# Altium PCB dsPIC_reciver_pcb2.PcbDoc
Units mm, origin at the board's own origin, x right, y up, seen from the top; angles counter-clockwise.
Board outline 54.36 x 85.34 mm, 2 copper layers (Top Layer, Bottom Layer); 37 components, 31 nets, 145 pads, 18 vias.
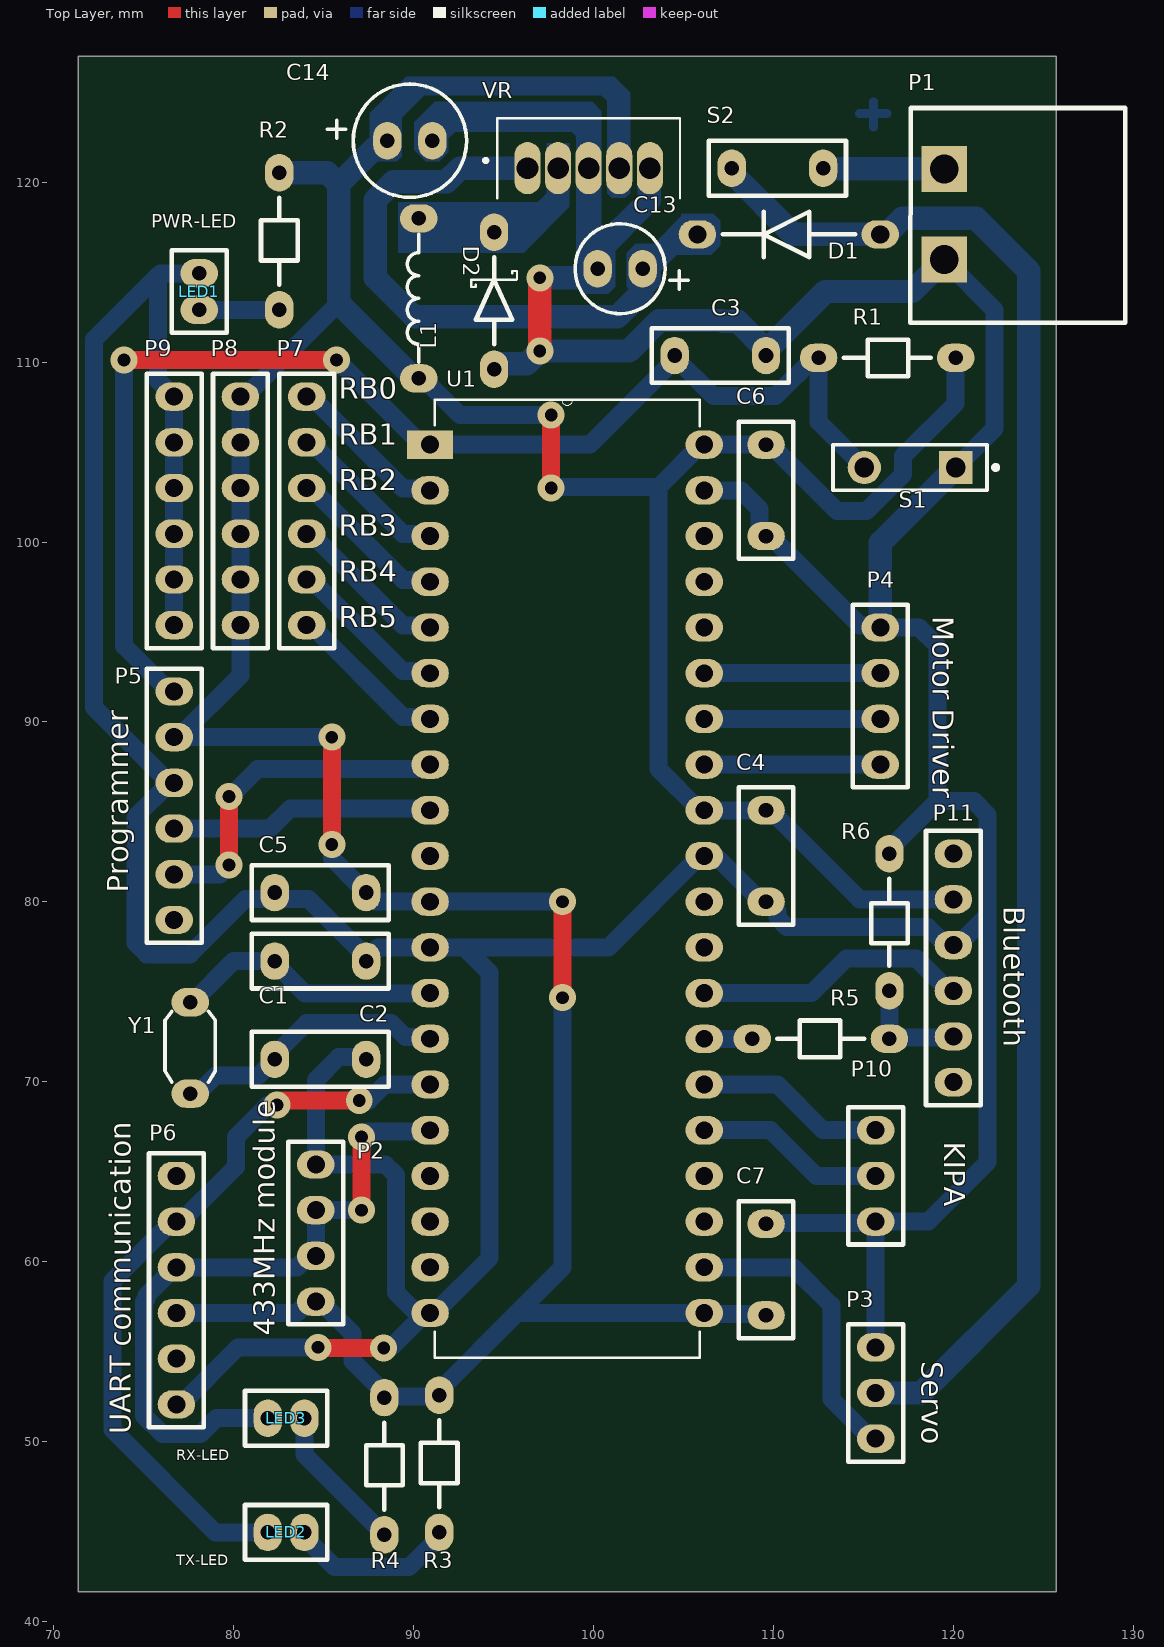
[diagram p0: Top Layer view]
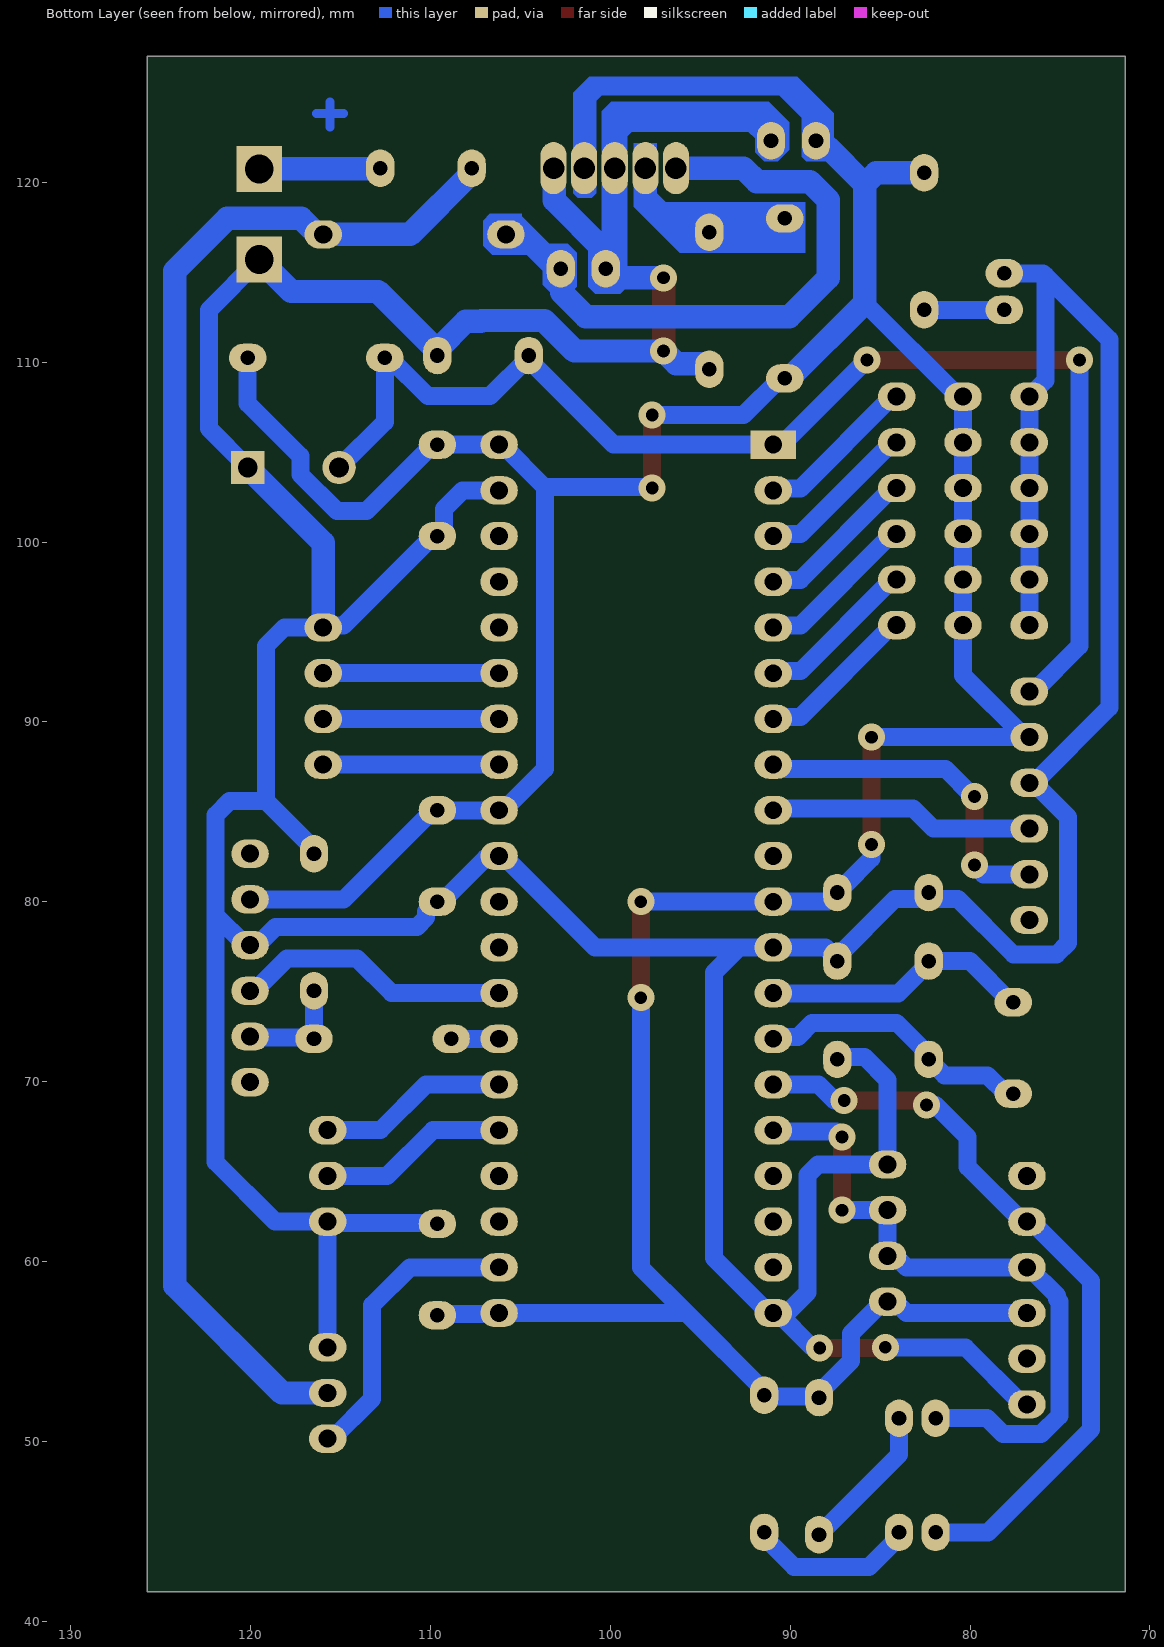
[diagram p1: Bottom Layer view, seen from below]

## Layer stack, top to bottom
Top Solder: solder mask 0.0102, Solder Resist, Dk 3.5
Top Layer: signal copper 0.0356
Dielectric 1: dielectric 0.32, FR-4, Dk 4.8
Bottom Layer: signal copper 0.0356
Bottom Solder: solder mask 0.0102, Solder Resist, Dk 3.5

## Board outline
71.374,41.656 125.73,41.656 125.73,127 71.374,127

## Design rules (kind name [scope] priority, off if disabled: settings)
Clearance [All] p1: gap=0.254 ignorepadtopadclearanceinfootprint=FALSE except(0: Arc-Hole Track-Hole SMDPad-Hole THPad-Hole Via-Hole Fill-Hole Poly-Hole Region-Hole Text-Hole; 0.127: THPad-THPad)
PolygonConnect [All] p1: connectstyle=Relief reliefconductorwidth=0.254 reliefentries=4 polygonreliefangle="90 Angle" airgapwidth=0.254
RoutingVias [All] p1: holewidth=0.711 width=1.27 viastyle="Through Hole" minholewidth=0.711 minwidth=1.27 maxholewidth=0.711 maxwidth=1.27
SolderMaskExpansion [All] p1: expansion=0.102
Width [All] p1: maxlimit=1.3 minlimit=0.5 preferedwidth=1
30 further rules are at their usual default settings.

## Components (designator, comment, footprint, x,y, rotation, side; value= is the part's Value field where it differs from the comment)
C1 "Cap" CAP200 87.376,76.708 r180 top value=22pF
C2 "Cap" CAP200 87.376,71.247 r180 top value=22pF
C3 "Cap" CAP200 109.601,110.363 r180 top value=100nF
C4 "Cap" CAP200 109.601,80.01 r90 top value=100nF
C5 "Cap" CAP200 82.296,80.518 r0 top value=100nF
C6 "Cap" CAP200 109.601,100.33 r90 top value=100nF
C7 "Cap" CAP200 109.601,62.103 r270 top value=100nF
C13 "Cap Pol1" RAD4 102.743,115.189 r180 top value=100uF
C14 "Cap Pol1" RAD6_3 88.559,122.301 r0 top value=1000uF
D1 "1N4004" DIODE400 115.951,117.094 r180 top
D2 "1N5819" SDIODE300 94.488,109.601 r90 top
L1 "Inductor" INDUCTOR_9 90.297,117.983 r270 top value=100uH
LED1 "GREEN" LED_2 78.105,112.903 r90 top
LED2 "GREEN" LED_2 83.947,44.958 r180 top
LED3 "GREEN" LED_2 83.947,51.308 r180 top
P1 "2EDGRC-5.08-02P-14-00A(H)" PWR_Con 119.507,115.697 r0 top
P2 "Reciver" HEADER_4 84.582,57.785 r180 top
P3 "Servo" HEADER_3 115.697,55.245 r0 top
P4 "Motor control" HEADER_4 115.951,87.63 r180 top
P5 "Programator" HEADER_6 76.708,91.694 r0 top
P6 "FT232" HEADER_6 76.835,64.77 r0 top
P7 "I/O" HEADER_6 84.074,108.077 r0 top
P8 "Header 6" HEADER_6 80.391,108.077 r0 top
P9 "Header 6" HEADER_6 76.708,108.077 r0 top
P10 "KIPA" HEADER_3 115.697,67.31 r0 top
P11 "Bluetooth" HEADER_6 120.015,82.677 r0 top
R1 "Res1" RES400 112.522,110.236 r0 top value=10K
R2 "Res1" RES400 82.55,112.903 r90 top value=1K
R3 "Res1" RES400 91.44,44.958 r90 top value=1K
R4 "Res1" RES400 88.392,44.831 r90 top value=1K
R5 "Res1" RES400 116.459,72.39 r180 top value=4.7K
R6 "Res1" RES400 116.459,82.677 r270 top value=10K
S1 "SW-PB" SPST-2 117.602,104.14 r180 top
S2 "SW-SPST" CAP200 112.776,120.777 r180 top
U1 "DSPIC30F4013-20E/P" DIP_40 106.172,57.15 r0 top
VR "LM2576T-5.0" TO170P1067X483X1651-5 99.744,120.777 r0 top
Y1 "XTAL" OSC_5 77.597,69.342 r90 top

## Footprints (in the part's own frame and the unit in brackets; to place one, negate y for a bottom-side part, rotate by r counter-clockwise, add the part's x,y. Pads: shape width x height; smd on the part's side, far side on the other; paste and mask are expansions set on the pad)
CAP200 [mil]
  oval 62x82 hole 32: 1(0,0) 2(200,0)
  silkscreen extent -50,-60 250,60
DIODE400 [mil]
  oval 82x62 hole 40: 1(0,0) 2(400,0)
  silkscreen extent 55,-50 345,50
DIP_40 [mil]
  rect 100x62 hole 39: 1(-600,1900)
  oval 82x62 hole 39: 2(-600,1800) 3(-600,1700) 4(-600,1600) 5(-600,1500) 6(-600,1400) 7(-600,1300) 8(-600,1200) 9(-600,1100) 10(-600,1000) 11(-600,900) 12(-600,800) 13(-600,700) 14(-600,600) 15(-600,500) 16(-600,400) 17(-600,300) 18(-600,200) 19(-600,100) 20(-600,0) 21(0,0) 22(0,100) 23(0,200) 24(0,300) 25(0,400) 26(0,500) 27(0,600) 28(0,700) 29(0,800) 30(0,900) 31(0,1000) 32(0,1100) 33(0,1200) 34(0,1300) 35(0,1400) 36(0,1500) 37(0,1600) 38(0,1700) 39(0,1800) 40(0,1900)
  silkscreen extent -590,-98 -10,1998
HEADER_3 [mil]
  oval 82x62 hole 39.37: 1(0,0) 2(0,-100) 3(0,-200)
  silkscreen extent -60,-250 60,50
HEADER_4 [mil]
  oval 82x62 hole 39.37: 1(0,0) 2(0,-100) 3(0,-200) 4(0,-300)
  silkscreen extent -60,-350 60,50
HEADER_6 [mil]
  oval 82x62 hole 39.37: 1(0,0) 2(0,-100) 3(0,-200) 4(0,-300) 5(0,-400) 6(0,-500)
  silkscreen extent -60,-550 60,50
INDUCTOR_9 [mil]
  oval 62x82 hole 32: 1(0,0) 2(350,0)
  silkscreen extent 35,-25 315,0
LED_2 [mil]
  oval 62x82 hole 32: 1(0,0) 2(80,0)
  silkscreen extent -50,-60 130,60
OSC_5 [mil]
  oval 62x82 hole 32: 1(0,0) 2(200,0)
  silkscreen extent 25,-55 180,55
PWR_Con [mm]
  rect 2.54x2.54 hole 1.6: 1(0,0) 2(0,5.029)
  silkscreen extent -1.88,-3.51 10.06,8.42, body extent -2.01,-3.59 10,8.57, height 8.73
RAD4 [mil]
  oval 62x82 hole 32: 1(0,0) 2(98.43,0)
  silkscreen extent -100,-98 147,98
RAD6_3 [mil]
  oval 62x82 hole 32: 1(0,0) 2(98.43,0)
  silkscreen extent -131,-124 173,124
RES400 [mil]
  oval 82x62 hole 32: 1(0,0) 2(300,0)
  silkscreen extent 55,-40 245,40
SDIODE300 [mil]
  oval 82x62 hole 32: 1(0,0) 2(300,0)
  silkscreen extent 55,-50 245,50
SPST-2 [mm] "Switch; 2 Leads"
  rect 1.85x1.85 hole 1.1: 1(-2.54,0)
  round 1.85 hole 1.1: 2(2.54,0)
  silkscreen extent -4.89,-1.27 4.28,1.27
TO170P1067X483X1651-5 [mm]
  oval 1.45x2.9 hole 1.2: 1(-3.4,0) 2(-1.7,0) 3(0,0) 4(1.7,0) 5(3.4,0)
  silkscreen extent -5.82,-1.68 5.08,2.77

## Part data
C1 C2 C3 C4 C5 C6 C7: "Capacitor", LatestRevisionDate=17-Jul-2002, LatestRevisionNote="Re-released for DXP Platform.", PackageDescription="Radial Cap, Thru-Hole; 2 Leads; 0.3 in Pin Spacing", PackageReference=RAD-0.3, Published=8-Jun-2000, Publisher="Altium Limited"
C13 C14: "Polarized Capacitor (Radial)", LatestRevisionDate=17-Jul-2002, LatestRevisionNote="Re-released for DXP Platform.", PackageDescription="Polarized Capacitor (Radial); 2 Leads", PackageReference=RB7.6-15, Published=8-Jun-2000, Publisher="Altium Limited"
D1: library part "Diode 1N4004", "1 Amp General Purpose Rectifier", Code_JEDEC=DO-204-AL, ComponentLink1Description="Manufacturer Link", ComponentLink1URL=http://www.fairchildsemi.com/, ComponentLink2Description=Datasheet, ComponentLink2URL=http://www.fairchildsemi.com/ds/1N%2F1N4001.pdf, DatasheetVersion=1998, LatestRevisionDate=17-Jul-2002, LatestRevisionNote="Re-released for DXP Platform.", PackageDescription="Diode, Axial; Body 5.2 x 2.7 mm (LxDia. max), Lead Dia. 0.86 mm (max)", PackageReference=DO-41, PackageVersion=Aug-1999, Published=8-Jun-2000, Publisher="Altium Limited"
D2: library part "D Schottky", "Schottky Diode", Code_JEDEC=DO-214-AA, LatestRevisionDate=17-Jul-2002, LatestRevisionNote="Re-released for DXP Platform.", PackageDescription="DO-214-AA/SMB; 2 C-Bend Leads; Body 5.3 x 3.6 mm, inc. leads (LxW)", PackageReference=SMB, Published=8-Jun-2000, Publisher="Altium Limited"
LED1 LED2 LED3: library part LED1, "Typical RED GaAs LED", LatestRevisionDate=08-Jul-2005, LatestRevisionNote="Mech Layer 1 removed.", PackageDescription="LED; 2 Leads", PackageReference=LED-1, Published=8-Jun-2000, Publisher="Altium Limited"
P1: library part 00000002, "TERM BLOCK HDR 2POS 90DEG 5.08MM", Manufacturer Part Number=2EDGRC-5.08-02P-14-00A(H), Price=0.1304, Suplier=TME, Suplier Product Link=https://www.tme.eu/en/details/2edgrc5.08-2p14/pluggable-terminal-blocks/degson-electronics/2edgrc-508-02p-14-00ah/
P2 P4: library part "Header 4", "Header, 4-Pin", LatestRevisionDate=17-Jul-2002, LatestRevisionNote="Re-released for DXP Platform.", Publisher="Altium Limited"
P3 P10: library part "Header 3", "Header, 3-Pin", LatestRevisionDate=17-Jul-2002, LatestRevisionNote="Re-released for DXP Platform.", Publisher="Altium Limited"
P5 P6 P7 P11: library part "Header 6", "Header, 6-Pin", LatestRevisionDate=17-Jul-2002, LatestRevisionNote="Re-released for DXP Platform.", Publisher="Altium Limited"
P8 P9: "Header, 6-Pin", LatestRevisionDate=17-Jul-2002, LatestRevisionNote="Re-released for DXP Platform.", Publisher="Altium Limited"
R1 R2 R3 R4 R5 R6: "Resistor", LatestRevisionDate=17-Jul-2002, LatestRevisionNote="Re-released for DXP Platform.", PackageDescription="Axial Device, Thru-Hole; 2 Leads; 0.3 in Pin Spacing", PackageReference=AXIAL-0.3, Published=8-Jun-2000, Publisher="Altium Limited"
S1: "Switch", LatestRevisionDate=17-Jul-2002, LatestRevisionNote="Re-released for DXP Platform.", PackageDescription="Switch; 2 Leads", PackageReference=SPST-2, Published=24-Mar-1999, Publisher="Altium Limited"
S2: "Single-Pole, Single-Throw Switch", LatestRevisionDate=17-Jul-2002, LatestRevisionNote="Re-released for DXP Platform.", PackageDescription="Switch; 2 Leads", PackageReference=SPST-2, Published=24-Mar-1999, Publisher="Altium Limited"
U1: "dsPIC dsPIC™ 30F Microcontroller IC 16-Bit 20 MIPS 48KB _16K x 24_ FLASH 40-PDIP", Package="DIP-40 Microchip", Digi-Key_Part_Number=DSPIC30F4013-20EP-ND, Digi-Key_Purchase_URL=https://www.digikey.rs/product-detail/en/microchip-technology/DSPIC30F4013-20E-P/DSPIC30F4013-20EP-ND/739428?utm_source=snapeda&utm_medium=aggregator&utm_campaign=symbol, MF=Microchip, MP=DSPIC30F4013-20E/P, SnapEDA_Link=https://www.snapeda.com/parts/DSPIC30F4013-20E/P/Microchip/view-part/143007/?ref=snap
VR: "Conv DC-DC 4V to 40V Inv/Step Down Single-Out 5V 3A 5-Pin(5+Tab) TO-220 Tube", Package=None, Availability=Warning, BuyPart=https://www.snapeda.com/parts/LM2576T-5.0/HTC%20Korea/view-part/4830195/?ref=eda, DigiKey-Purchase-URL=https://snapeda.com/shop?store=DigiKey&id=4830195, MF="HTC Korea", Mouser-Purchase-URL=https://snapeda.com/shop?store=Mouser&id=4830195, MP=LM2576T-5.0, Price=None, SnapEDA_Link=https://www.snapeda.com/parts/LM2576T-5.0/HTC%20Korea/view-part/4830195/?ref=snap
Y1: "Crystal Oscillator", LatestRevisionDate=17-Jul-2002, LatestRevisionNote="Re-released for DXP Platform.", PackageDescription="Crystal, Thru-Hole; 2 Leads; Body 3.1 x 8.2 mm (Dia.xH)", PackageReference=R38, Published=8-Jun-2000, Publisher="Altium Limited"
L1: Code_IEC=1005, Code_JEITA=0402, LatestRevisionDate=29-May-2009, LatestRevisionNote="IPC-7351 Footprint Added.", PackageDescription="Chip Inductor", PackageReference=0402-A, Published=8-Jun-2000, Publisher="Altium Limited"

## Via types
v1: diameter 1.5, hole 0.711, Top Layer to Bottom Layer, tented both sides, 18 vias

## Nets (pads, with @x,y where several pads share a name; then routed paths per layer and width w, separated by ;. In a path a pad name is that pad's centre, name@x,y a point inside that pad or via, vN(x,y) a via of type N, cw(c..) or ccw(c..) an arc to the next point about the centre after c; other vN are vias at no path point)
EN: P4.3 U1.35 | length 9.8
  Bottom Layer w1: U1.35 P4.3
GND: C1.1 C2.1 C3.1 C4.1 C5.1 C6.1 C7.1 C13.2 C14.2 D2.1 LED1.2 P1.1 P2.4 P3.1 P4.4 P5.3 P6.6 P9.1 P9.2 P9.3 P9.4 P9.5 P9.6 P10.3 P11.3 R6.1 S1.1 U1.12 U1.20 U1.31 U1.39 VR.3 VR.5 | length 321.2
  Top Layer w1: v1(84.709,55.245) 84.747,55.207 v1(88.354,55.207)
  Top Layer w1.3: v1(97.028,110.617) v1(97.028,114.681)
  Bottom Layer w1: P5.3 P5.3@76.454,86.614 ; P9.6 P9.5 P9.4 P9.3 P9.2 P9.1 76.61,108.077 76.344,108.343 76.344,108.441 75.819,108.966 75.819,114.808 ; P6.6 77.089,52.07 80.264,55.245 v1(84.709,55.245) ; LED1.2@77.995,114.825 LED1.2 75.946,114.935 75.819,114.808 ; C5.1 C5.1@82.296,80.42 ; C2.1 87.376,71.149 87.151,71.374 85.852,71.374 84.582,70.104 P2.4 88.441,65.405 89.027,64.819 89.027,58.293 90.17,57.15 U1.20@90.678,57.15 ; C1.1 C1.1@87.376,76.806 ; v1(88.354,55.207) 88.444,55.297 88.825,55.297 U1.20@90.678,57.15 ; U1.39 108.204,102.87 109.237,101.837 109.237,100.596 109.503,100.33 C6.1 109.855,100.33 114.825,95.36 115.841,95.36 P4.4 118.11,95.25 119.126,94.234 119.126,85.598 ; C7.1 109.664,62.166 115.633,62.166 P10.3 ; P3.1@115.587,55.135 P3.1 P10.3 ; R6.1 116.459,82.931 119.126,85.598 ; P1.1 122.301,112.903 122.301,106.299 S1.1 ; 75.819,114.808 72.263,111.252 72.263,90.805 P5.3@76.454,86.614 ; P5.3@76.454,86.614 74.549,84.709 74.549,77.724 75.184,77.089 77.597,77.089 80.662,80.154 82.03,80.154 C5.1@82.296,80.42 ; C5.1@82.296,80.42 82.562,80.154 84.184,80.154 87.376,76.962 C1.1@87.376,76.806 ; C1.1@87.376,76.806 88.04,77.47 U1.12 92.837,77.47 ; U1.20@90.678,57.15 U1.20 91.186,57.15 94.234,60.198 94.234,76.073 92.837,77.47 ; 92.837,77.47 100.838,77.47 105.918,82.55 U1.31 106.282,82.44 106.917,82.44 109.347,80.01 C4.1 109.699,80.01 110.236,79.473 110.236,79.121 110.744,78.613 118.589,78.613 119.605,77.597 P11.3 120.269,77.597 121.92,79.248 ; P10.3 118.618,62.23 121.92,65.532 121.92,79.248 ; 119.126,85.598 121.158,85.598 121.92,84.836 121.92,79.248
  Bottom Layer w1.3: D2.1 94.488,109.781 94.615,109.908 96.319,109.908 v1(97.028,110.617) 101.981,110.617 103.672,112.308 107.148,112.308 107.188,112.268 108.024,112.268 109.601,110.691 C3.1@109.601,110.617 ; v1(97.028,114.681) 99.735,114.681 99.936,114.882 100.116,114.882 100.243,115.009 C13.2 100.296,115.242 100.296,116.171 103.115,118.99 103.115,120.748 VR.5 ; C3.1 C3.1@109.601,110.617 ; P4.4 115.951,99.949 S1.1 ; P1.1 117.729,113.919 112.903,113.919 C3.1@109.601,110.617
KIPA1: P10.2 U1.25 | length 10.6
  Bottom Layer w1: U1.25 109.855,67.31 112.395,64.77 P10.2
KIPA2: P10.1 U1.26 | length 10.6
  Bottom Layer w1: U1.26 110.236,69.85 112.776,67.31 P10.1
MCLR: C3.2 P5.1 R1.1 S1.2 U1.1 | length 71.4
  Top Layer w1: v1(73.914,110.109) v1(85.725,110.109)
  Bottom Layer w1: v1(73.914,110.109) 73.914,94.234 76.454,91.694 P5.1 ; v1(85.725,110.109) 85.75,110.109 90.449,105.41 U1.1 99.822,105.41 104.521,110.109 C3.2@104.521,110.265 ; C3.2 C3.2@104.521,110.265 ; S1.2 112.522,106.68 R1.1 112.268,110.236 110.138,108.106 106.68,108.106 C3.2@104.521,110.265
NetC13_1: C13.1 D1.2 VR.1 | length 31.1
  Bottom Layer w1.3: VR.1 92.591,120.777 91.844,120.03 88.907,120.03 87.884,119.007 87.884,114.681 90.043,112.522 101.346,112.522 102.69,113.866 102.69,115.136 C13.1
NetD2_2: D2.2 L1.1 VR.2
NetLED1_1: LED1.1 R2.1 | length 4.4
  Bottom Layer w1: LED1.1 R2.1
NetLED2_1: LED2.1 R3.1 | length 9.4
  Bottom Layer w1: LED2.1 83.947,44.704 85.615,43.036 89.772,43.036 91.44,44.704 R3.1
NetLED3_1: LED3.1 R4.1 | length 8.3
  Bottom Layer w1: LED3.1 83.947,49.276 R4.1
NetP1_2: P1.2 S2.1 | length 6.8
  Bottom Layer w1.3: S2.1 112.801,120.752 119.482,120.752 P1.2
NetP11_5: P11.5 R5.1 R6.2 | length 6.3
  Bottom Layer w1: R6.2 R5.1 116.522,72.453 119.951,72.453 P11.5
OSC1: C1.2 U1.13 Y1.2 | length 15.1
  Bottom Layer w1: Y1.2 77.723,74.422 80.009,76.708 C1.2 82.296,76.606 83.989,74.913 90.915,74.913 U1.13
OSC2: C2.2 U1.14 Y1.1 | length 15.5
  Bottom Layer w1: Y1.1 78.007,69.342 79.023,70.358 81.407,70.358 81.932,70.883 82.03,70.883 82.296,71.149 C2.2 82.296,71.501 84.074,73.279 88.773,73.279 89.552,72.5 90.822,72.5 U1.14
PGC: P5.5 U1.8 | length 19
  Top Layer w1: v1(79.756,82.042) v1(79.756,85.852)
  Bottom Layer w1: P5.5 79.248,81.534 v1(79.756,82.042) ; v1(79.756,85.852) 79.829,85.852 81.353,87.376 90.678,87.376 U1.8
PGD: P5.4 U1.9 | length 14.7
  Bottom Layer w1: P5.4 82.042,84.074 83.168,85.2 90.822,85.2 U1.9
PWM1: P4.1 U1.33 | length 9.8
  Bottom Layer w1: U1.33 P4.1
PWM2: P4.2 U1.34 | length 9.8
  Bottom Layer w1: U1.34 P4.2
RB0: P7.1 U1.2 | length 9
  Bottom Layer w1: P7.1 84.328,108.077 89.425,102.98 90.822,102.98 U1.2
RB1: P7.2 U1.3 | length 9
  Bottom Layer w1: P7.2 84.328,105.537 89.425,100.44 90.822,100.44 U1.3
RB2: P7.3 U1.4 | length 9
  Bottom Layer w1: P7.3 84.328,102.997 89.425,97.9 90.822,97.9 U1.4
RB3: P7.4 U1.5 | length 9
  Bottom Layer w1: P7.4 84.328,100.457 89.425,95.36 90.822,95.36 U1.5
RB4: P7.5 U1.6 | length 9
  Bottom Layer w1: P7.5 84.328,97.917 89.425,92.82 90.822,92.82 U1.6
RB5: P7.6 U1.7 | length 9
  Bottom Layer w1: P7.6 84.328,95.377 89.425,90.28 90.822,90.28 U1.7
SERVO_PWM: P3.3 U1.22 | length 16.5
  Bottom Layer w1: U1.22 111.125,59.69 113.229,57.586 113.229,52.379 115.443,50.165 P3.3
U1ARX: LED3.2 P2.2 P2.3 P6.3 U1.16 | length 37.8
  Top Layer w1: v1(87.122,62.865) v1(87.122,66.929)
  Bottom Layer w1: LED3.2 79.052,51.308 78.163,50.419 76.052,50.419 75.04,51.432 75.04,57.788 75.168,57.917 75.168,58.121 76.737,59.69 P6.3 83.537,59.69 84.172,60.325 P2.2 P2.3 v1(87.122,62.865) ; v1(87.122,66.929) 87.428,67.235 90.857,67.235 U1.16
U1ATX: LED2.2 P6.2 U1.15 | length 42.4
  Top Layer w1: v1(82.423,68.707) 82.677,68.961 v1(86.995,68.961)
  Bottom Layer w1: LED2.2 78.994,44.958 73.279,50.673 73.279,58.928 76.581,62.23 P6.2 77.089,62.23 80.137,65.278 80.137,66.929 81.915,68.707 v1(82.423,68.707) ; v1(86.995,68.961) 87.524,68.961 88.413,69.85 U1.15
U2RX: P11.4 U1.28 | length 15.4
  Bottom Layer w1: U1.28 112.141,74.93 114.063,76.852 117.966,76.852 119.761,75.057 P11.4
U2TX: R5.2 U1.27 | length 2.7
  Bottom Layer w1: U1.27 R5.2
VCC: D1.1 P3.2 S2.2 | length 87.2
  Bottom Layer w1.3: S2.2 107.696,120.523 111.125,117.094 D1.1 116.279,117.094 117.168,117.983 121.285,117.983 124.206,115.062 124.206,102.108 124.206,58.674 118.237,52.705 P3.2 P3.2@115.75,52.758
VCC_5V: C4.2 C5.2 C6.2 C7.2 C14.1 L1.2 P2.1 P5.2 P6.4 P8.1 P8.2 P8.3 P8.4 P8.5 P8.6 P11.2 R1.2 R2.2 R3.2 R4.2 U1.11 U1.21 U1.32 U1.40 VR.4 | length 217.8
  Top Layer w1: v1(85.471,83.185) v1(85.471,89.154) ; v1(97.663,102.997) v1(97.663,107.061) ; v1(98.298,74.676) v1(98.298,80.01)
  Bottom Layer w1: P5.2@76.454,89.154 P5.2 ; P6.4 83.537,57.15 84.172,57.785 P2.1 84.836,57.785 86.614,56.007 86.614,54.483 88.392,52.705 R4.2 88.456,52.514 91.376,52.514 R3.2 91.44,52.832 95.758,57.15 ; v1(85.471,83.185) 85.471,82.423 87.012,80.882 87.11,80.882 87.376,80.616 C5.2 87.376,80.42 87.642,80.154 87.74,80.154 87.884,80.01 U1.11 v1(98.298,80.01) ; v1(85.471,89.154) 76.962,89.154 80.391,92.583 P8.6 P8.5 P8.4 P8.3 P8.2 P8.1 80.645,108.077 85.852,113.284 ; L1.2 90.551,109.093 92.583,107.061 v1(97.663,107.061) ; v1(97.663,102.997) 97.712,103.046 103.632,103.046 ; v1(98.298,74.676) 98.298,59.69 95.758,57.15 ; C7.2 109.537,57.087 106.236,57.087 U1.21 95.758,57.15 ; P11.2 114.808,80.137 109.855,85.09 C4.2 U1.32 105.918,85.09 103.632,87.376 103.632,103.046 ; R1.2 120.142,107.696 117.221,104.775 117.221,103.759 115.189,101.727 113.538,101.727 109.855,105.41 C6.2 U1.40 105.996,105.41 103.632,103.046
  Bottom Layer w1.3: R2.2 85.217,120.523 85.852,119.888 ; C14.1 88.559,122.121 88.358,121.92 87.884,121.92 85.852,119.888 ; L1.2 90.043,109.093 85.852,113.284 85.852,119.888
pads on no net: P5.6 P6.1 P6.5 P11.1 P11.6 U1.10 U1.17 U1.18 U1.19 U1.23 U1.24 U1.29 U1.30 U1.36 U1.37 U1.38
copper on no net: | length 2.9
  Bottom Layer w0.5: 114.808,123.825 116.332,123.825 ; 115.57,123.063 115.57,124.46

## Other copper
Bottom Layer:
  region net VCC_5V: 87.82,121.158 87.566,121.412 87.566,123.825 89.599,125.857 101.155,125.857 102.044,124.968 102.044,119.38 101.79,119.126 101.028,119.126 100.774,119.38 100.774,124.523 100.457,124.841 90.615,124.841 89.344,123.571 89.344,121.412 89.09,121.158
  region net NetC13_1: 101.854,116.078 102.362,116.586 103.378,116.586 104.902,118.11 104.902,118.237 106.68,118.237 107.061,117.856 107.061,116.459 106.553,115.951 104.648,115.951 103.759,115.062 103.759,114.3 103.251,113.792 102.235,113.792 101.854,114.173
  region net GND: 99.06,119.634 99.06,114.173 99.441,113.792 100.838,113.792 101.219,114.173 101.219,116.205 100.457,116.967 100.457,119.634
  region net GND: 90.678,121.158 90.043,121.793 90.043,123.317 91.186,124.46 99.949,124.46 100.457,123.952 100.457,119.634 99.06,119.634 99.06,122.555 98.806,122.809 92.329,122.809 91.948,122.428 91.948,121.666 91.44,121.158
  region net NetD2_2: 96.774,118.745 97.409,119.38 97.409,118.745
  region net NetD2_2: 89.154,118.872 97.409,118.872 97.409,122.174 98.679,122.174 98.679,118.618 96.139,116.078 89.154,116.078

## Silkscreen, mask and mechanical layers (free items; w line width, h text height)
Top Overlay:
  text "PWR-LED" at 75.438,117.221 h1.3
  text "RB0" at 85.852,107.569 h2
  text "RB1" at 85.852,105.029 h2
  text "RB2" at 85.852,102.489 h2
  text "RB3" at 85.852,99.949 h2
  text "RB4" at 85.852,97.409 h2
  text "Motor Driver" at 118.491,95.885 h2 r270
  text "RB5" at 85.852,94.869 h2
  text "Programmer" at 74.549,80.518 h2 r90
  text "Bluetooth" at 122.428,79.756 h2 r270
  text "KIPA" at 119.126,66.675 h2 r270
  text "433MHz module" at 82.677,55.88 h2 r90
  text "Servo" at 117.856,54.483 h2 r270
  text "UART communication" at 74.676,50.419 h2 r90
  text "RX-LED" at 76.835,48.768 h1
  text "TX-LED" at 76.835,42.926 h1